# EAGLE board MEDUSA_AMEGA_Shield (EAGLE 9.5.1)
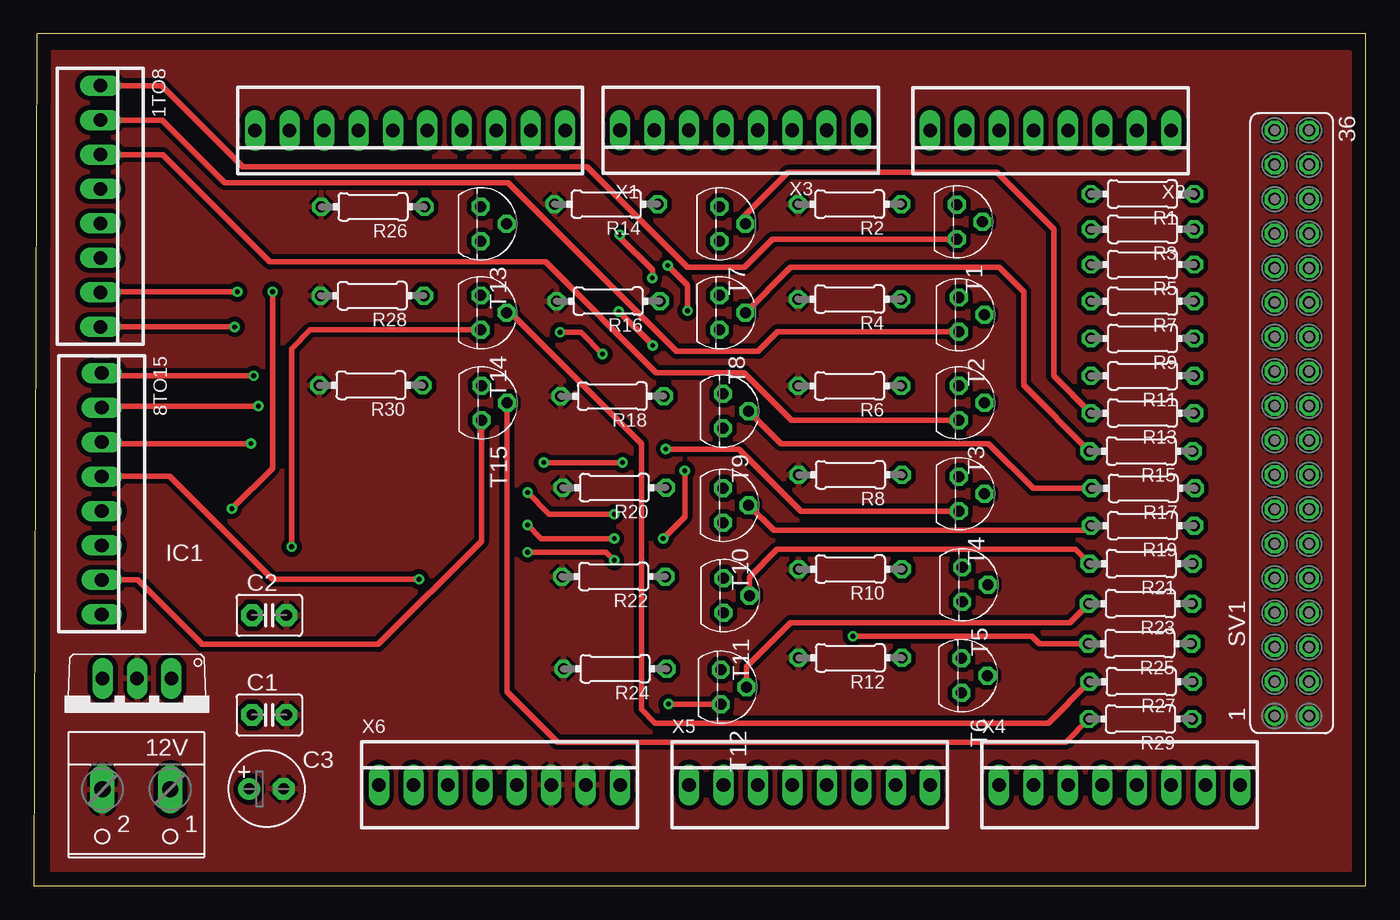
[diagram p0: board, top side]
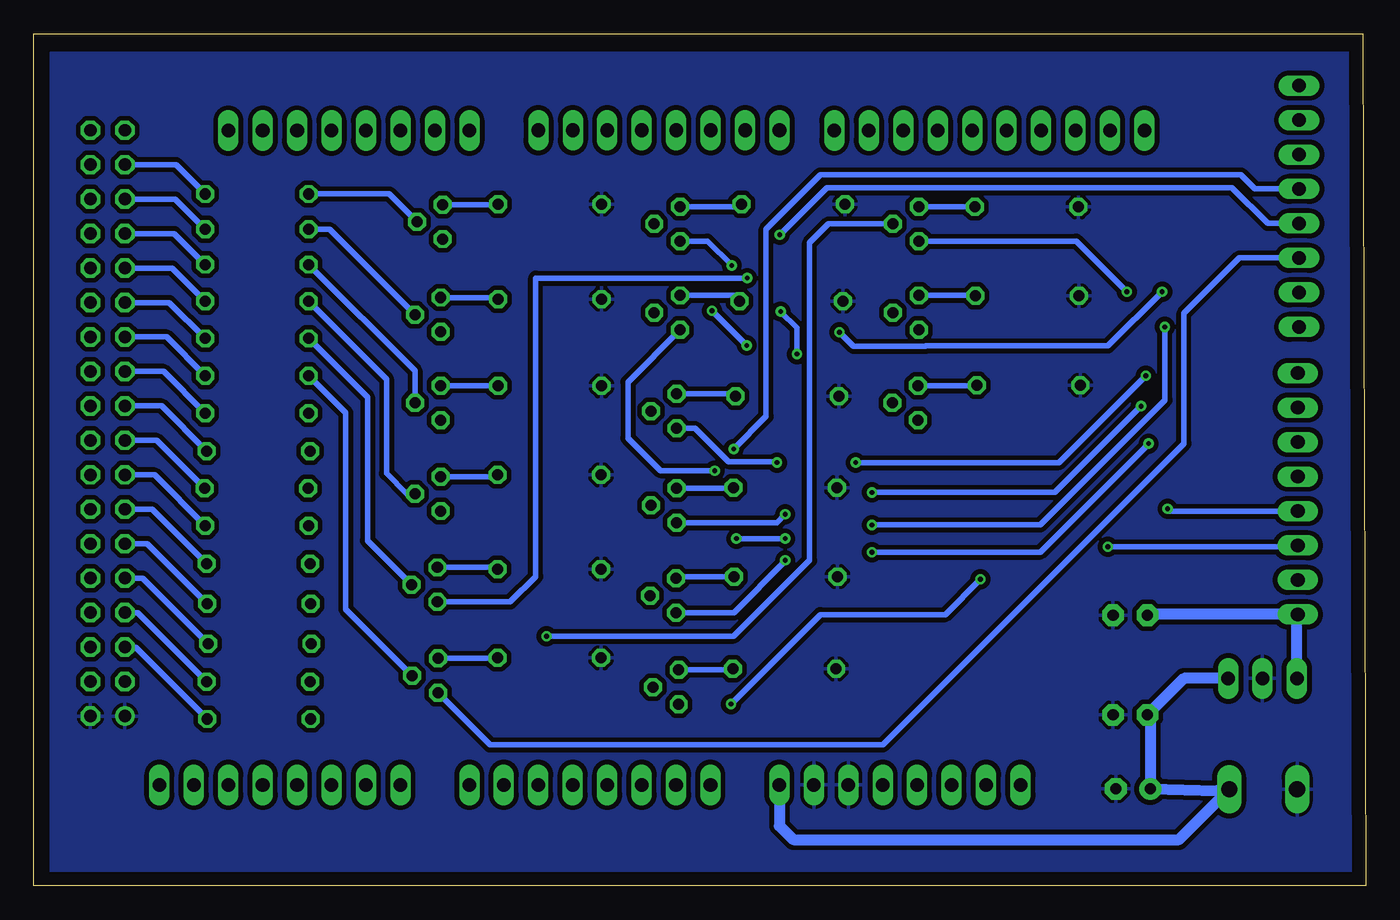
[diagram p1: board, bottom side, seen from below]

Size 98.2 x 62.8 mm. Coordinates in mm from the lower left corner, seen from the top.
Outline: 0,0 98.2,0 98.2,62.8 0.2,62.8 0,0
Copper layers (1*16): Top 0.035mm / dielectric 1.5mm / Bottom 0.035mm
Design rules "default *": minimum track width 6mil, minimum drill 0.35mm, track to track 14mil, track to pad 14mil, pad to pad 14mil, via to via 14mil, smd to smd 6mil, copper to edge 40mil, drill to drill 6mil, minimum pad ring 10mil, minimum via ring 8mil, stop-mask expansion 4mil, vias tented up to drill 0mil, thermal gap 10mil

## Footprints (pad centres in the part's own frame; a part is rotated, then mirrored left to right if it is on the bottom)
22-23-2081 = drill 1 long: 1 -8.89,0; 2 -6.35,0; 3 -3.81,0; 4 -1.27,0; 5 1.27,0; 6 3.81,0; 7 6.35,0; 8 8.89,0
W237-102 = drill 1.194 long: 1 -2.5,-1.27; 2 2.5,-1.27
C2.5-3 = drill 0.813 pad 1.6 octagon: 1 -1.27,0; 2 1.27,0
E2,5-6 = drill 0.813 pad 1.6: + -1.27,0 | drill 0.813 pad 1.6 octagon: - 1.27,0
TO220V = drill 1.016 long: 1 -2.54,-2.54; 2 0,-2.54; 3 2.54,-2.54
0204/7 = drill 0.813 octagon: 1 -3.81,0; 2 3.81,0
FE18-2 = drill 0.914: 1 -21.59,1.27 | drill 0.914 octagon: 2 -21.59,-1.27; 3 -19.05,1.27; 4 -19.05,-1.27; 5 -16.51,1.27; 6 -16.51,-1.27; 7 -13.97,1.27; 8 -13.97,-1.27; 9 -11.43,1.27; 10 -11.43,-1.27; 11 -8.89,1.27; 12 -8.89,-1.27; 13 -6.35,1.27; 14 -6.35,-1.27; 15 -3.81,1.27; 16 -3.81,-1.27; 17 -1.27,1.27; 18 -1.27,-1.27; 19 1.27,1.27; 20 1.27,-1.27; 21 3.81,1.27; 22 3.81,-1.27; 23 6.35,1.27; 24 6.35,-1.27; 25 8.89,1.27; 26 8.89,-1.27; 27 11.43,1.27; 28 11.43,-1.27; 29 13.97,1.27; 30 13.97,-1.27; 31 16.51,1.27; 32 16.51,-1.27; 33 19.05,1.27; 34 19.05,-1.27; 35 21.59,1.27; 36 21.59,-1.27
TO92 = drill 0.813 octagon: 1 1.27,0; 2 0,1.905; 3 -1.27,0
22-23-2101 = drill 1 long: 1 -11.43,0; 2 -8.89,0; 3 -6.35,0; 4 -3.81,0; 5 -1.27,0; 6 1.27,0; 7 3.81,0; 8 6.35,0; 9 8.89,0; 10 11.43,0

## Placement (x,y rotation side)
1TO8  22-23-2081  [22-23-2081]  4.9,50.1 270 top
8TO15  22-23-2081  [22-23-2081]  5,28.9 270 top
12V  [W237-102]  7.55,5.85 180 top
C1  [C2.5-3]  17.35,12.6 0 top
C2  [C2.5-3]  17.35,19.95 0 top
C3  [E2,5-6]  17.15,7.15 0 top
IC1  7805TV  [TO220V]  7.6,12.75 180 top
R1  [0204/7]  81.75,51 180 top
R2  [0204/7]  60.15,50.25 180 top
R3  [0204/7]  81.75,48.4 180 top
R4  [0204/7]  60.15,43.25 180 top
R5  [0204/7]  81.75,45.8 180 top
R6  [0204/7]  60.15,36.85 180 top
R7  [0204/7]  81.75,43.1 180 top
R8  [0204/7]  60.2,30.3 180 top
R9  [0204/7]  81.75,40.35 180 top
R10  [0204/7]  60.2,23.35 180 top
R11  [0204/7]  81.75,37.6 180 top
R12  [0204/7]  60.2,16.8 180 top
R13  [0204/7]  81.75,34.85 180 top
R14  [0204/7]  42.2,50.25 180 top
R15  [0204/7]  81.65,32.05 180 top
R16  [0204/7]  42.35,43.1 180 top
R17  [0204/7]  81.8,29.3 180 top
R18  [0204/7]  42.65,36.1 180 top
R19  [0204/7]  81.75,26.55 180 top
R20  [0204/7]  42.8,29.35 180 top
R21  [0204/7]  81.65,23.75 180 top
R22  [0204/7]  42.75,22.8 180 top
R23  [0204/7]  81.6,20.8 180 top
R24  [0204/7]  42.85,16 180 top
R25  [0204/7]  81.55,17.85 180 top
R26  [0204/7]  25,50.05 180 top
R27  [0204/7]  81.65,15.05 180 top
R28  [0204/7]  24.95,43.5 180 top
R29  [0204/7]  81.6,12.3 180 top
R30  [0204/7]  24.85,36.9 180 top
SV1  [FE18-2]  92.76,34.11 90 top
T1  2N3904  [TO92]  68.05,48.95 270 top
T2  2N3904  [TO92]  68.2,42.1 270 top
T3  2N3904  [TO92]  68.2,35.6 270 top
T4  2N3904  [TO92]  68.2,28.9 270 top
T5  2N3904  [TO92]  68.45,22.2 270 top
T6  2N3904  [TO92]  68.4,15.5 270 top
T7  2N3904  [TO92]  50.55,48.8 270 top
T8  2N3904  [TO92]  50.55,42.25 270 top
T9  2N3904  [TO92]  50.8,35 270 top
T10  2N3904  [TO92]  50.8,28.05 270 top
T11  2N3904  [TO92]  50.85,21.4 270 top
T12  2N3904  [TO92]  50.65,14.65 270 top
T13  2N3904  [TO92]  32.95,48.8 270 top
T14  2N3904  [TO92]  32.95,42.25 270 top
T15  2N3904  [TO92]  33,35.6 270 top
X1  22-23-2101  [22-23-2101]  27.74,55.68 180 top
X2  22-23-2081  [22-23-2081]  74.98,55.67 180 top
X3  22-23-2081  [22-23-2081]  52.11,55.7 180 top
X4  22-23-2081  [22-23-2081]  80.06,7.44 0 top
X5  22-23-2081  [22-23-2081]  57.2,7.44 0 top
X6  22-23-2081  [22-23-2081]  34.34,7.44 0 top

## Library data of the parts
1TO8 8TO15 X2-X6 = con-molex; MF: MOLEX; MPN: 22-23-2081; OC_FARNELL: 1756826; OC_NEWARK: 01C7592
12V = con-wago-500; MPN: 237-102; OC_FARNELL: unknown; OC_NEWARK: 70K9898
C1 C2 = capacitor-wima
C3 = rcl; SPICEPREFIX: C
IC1 = linear
R1-R30 = rcl; SPICEPREFIX: R
SV1 = con-lsta; OC_FARNELL: unknown; OC_NEWARK: unknown
T1-T15 = transistor
X1 = con-molex; MF: MOLEX; MPN: 22-23-2101; OC_FARNELL: 1756828; OC_NEWARK: 94C0765

## Nets
3.3V: X6.4
5V: X6.5
5VLED: 8TO15.8 C2.1 IC1.3
12V: 12V.1 C1.1 C3.+ IC1.1 X6.8
A0: X5.1
A1: X5.2
A2: X5.3
A3: X5.4
A4: X5.5
A5: X5.6
A6: X5.7
A7: X5.8
A8: X4.1
A9: X4.2
A10: X4.3
A11: X4.4
A12: X4.5
A13: X4.6
A14: X4.7
A15: X4.8
AREF: X1.8
GND: 12V.2 C1.2 C2.2 C3.- IC1.2 R2.2 R4.2 R6.2 R8.2 R10.2 R12.2 R14.2 R16.2 R18.2 R20.2 R22.2 R24.2 R26.2 R28.2 R30.2 SV1.1 SV1.2 X6.6 X6.7
GND3: X1.7
I/OREF: X6.2
L1: 1TO8.1 T1.1
L2: 1TO8.2 T2.1
L3: 1TO8.3 T3.1
L4: 1TO8.4 T4.1
L5: 1TO8.5 T5.1
L6: 1TO8.6 T6.1
L7: 1TO8.7 T7.1
L8: 1TO8.8 T8.1
L9: 8TO15.1 T9.1
L10: 8TO15.2 T10.1
L11: 8TO15.3 T11.1
L12: 8TO15.4 T12.1
L13: 8TO15.5 T13.1
L14: 8TO15.6 T14.1
L15: 8TO15.7 T15.1
N$1: R1.2 T1.2
N$2: R2.1 T1.3
N$19: R3.2 T2.2
N$20: R4.1 T2.3
N$22: R5.2 T3.2
N$23: R6.1 T3.3
N$25: R7.2 T4.2
N$26: R8.1 T4.3
N$28: R9.2 T5.2
N$29: R10.1 T5.3
N$31: R11.2 T6.2
N$32: R12.1 T6.3
N$34: R13.2 T7.2
N$35: R14.1 T7.3
N$37: R15.2 T8.2
N$38: R16.1 T8.3
N$40: R17.2 T9.2
N$41: R18.1 T9.3
N$43: R19.2 T10.2
N$44: R20.1 T10.3
N$46: R21.2 T11.2
N$47: R22.1 T11.3
N$49: R23.2 T12.2
N$50: R24.1 T12.3
N$52: R25.2 T13.2
N$53: R26.1 T13.3
N$55: R27.2 T14.2
N$56: R28.1 T14.3
N$58: R29.2 T15.2
N$59: R30.1 T15.3
N/C: X6.1
P0: X3.1
P1: X3.2
P2: X3.3
P3: X3.4
P4: X3.5
P5: X3.6
P5V1: SV1.35
P5V2: SV1.36
P6: X3.7
P7: X3.8
P8: X1.1
P9: X1.2
P10: X1.3
P11: X1.4
P12: X1.5
P13: X1.6
P14: X2.8
P15: X2.7
P16: X2.6
P17: X2.5
P18: X2.4
P19: X2.3
P20: X2.2
P21: X2.1
P22: R1.1 SV1.33
P23: SV1.34
P24: R3.1 SV1.31
P25: SV1.32
P26: R5.1 SV1.29
P27: SV1.30
P28: R7.1 SV1.27
P29: SV1.28
P30: R9.1 SV1.25
P31: SV1.26
P32: R11.1 SV1.23
P33: SV1.24
P34: R13.1 SV1.21
P35: SV1.22
P36: R15.1 SV1.19
P37: SV1.20
P38: R17.1 SV1.17
P39: SV1.18
P40: R19.1 SV1.15
P41: SV1.16
P42: R21.1 SV1.13
P43: SV1.14
P44: R23.1 SV1.11
P45: SV1.12
P46: R25.1 SV1.9
P47: SV1.10
P48: R27.1 SV1.7
P49: SV1.8
P50: R29.1 SV1.5
P51: SV1.6
P52: SV1.3
P53: SV1.4
RESET: X6.3
SCL: X1.10
SDA: X1.9

## Tracks (layer width: path | path; a pad name or v marks a point on that pad's centre or on a via)
5VLED
  Bottom 0.813: IC1.3 5.06,19.95 8TO15.8 16.02,20.01 C2.1
12V
  Bottom 0.813: IC1.1 13.39,15.29 C1.1 15.88,12.4 C3.+ 10.95,7.02 12V.1 13.77,3.4 42.2,3.4 43.23,4.43 X6.8
GND
  pour Bottom: 1,61.4 97,61.4 97,1 1,1
  pour Top: 1.4,61.4 97,61.4 97,1.2 1.4,1.2
L1
  Top 0.406: T1.1 54.48,47.68 52.4,45.6 48.2,45.6 40.8,53 15.4,53 9.41,58.99 1TO8.1
L2
  Top 0.406: T2.1 54.83,40.83 53.4,39.4 47.4,39.4 34.96,51.84 14.08,51.84 9.47,56.45 1TO8.2
L3
  Top 0.406: T3.1 55.87,34.33 52.36,37.84 45.88,37.84 37.72,46 17.4,46 9.49,53.91 1TO8.3
L4  (via drill 0.35)
  Top 0.406: T4.1 56.57,27.63 52,32.2 v46.6,32.2
  Bottom 0.406: v46.6,32.2 44.2,34.6 44.2,48.4 40.2,52.4 9.2,52.4 8.17,51.37 1TO8.4
L5  (via drill 0.35)
  Top 0.406: v45.6,44.8 45.6,45.4 43.2,47.8 v43.2,48
  Bottom 0.406: T5.1 63.07,20.93 61.2,22.8 61.2,44.8 v45.6,44.8 | 1TO8.5 7.23,48.83 9.87,51.47 39.73,51.47 v43.2,48 43.27,47.93
L6
  Bottom 0.406: T6.1 64.57,10.4 35.6,10.4 13.4,32.6 13.4,42.2 9.31,46.29 1TO8.6
L7  (via drill 0.35)
  Top 0.406: v46.74,45.74 48.2,44.27 v48.2,42.4 | v45.64,39.84 v43.14,42.34 | v41.94,39.2 40.34,40.8 v38.8,40.8 | v15,43.8 4.95,43.8 1TO8.7
  Bottom 0.406: T7.1 48.53,47.53 v46.74,45.74 | v48.2,42.4 v45.64,39.84 | v43.14,42.34 41.94,41.14 v41.94,39.2 | v38.8,40.8 37.76,39.76 32.45,39.76 32.41,39.8 19,39.8 v15,43.8
L8  (via drill 0.35)
  Top 0.406: v48,30.6 48,27.2 v46.4,25.6 | v42.8,25.6 37.4,25.6 v36.4,26.6 | v14.8,41.2 1TO8.8
  Bottom 0.406: T8.1 54.4,37.13 54.4,33 52,30.6 v48,30.6 | v46.4,25.6 v42.8,25.6 | v36.4,26.6 24,26.6 14.8,35.8 v14.8,41.2
L9  (via drill 0.35)
  Top 0.406: v43.4,31.2 v37.6,31.2 | v16.2,37.6 5.19,37.6 8TO15.1
  Bottom 0.406: T9.1 49.45,33.73 46.99,31.26 43.46,31.26 v43.4,31.2 | v37.6,31.2 22.6,31.2 v16.2,37.6
L10  (via drill 0.35)
  Top 0.406: v42.8,27.4 38,27.4 v36.4,29 | v16.56,35.36 5.11,35.36 8TO15.2
  Bottom 0.406: T10.1 43.42,26.78 v42.8,27.4 | v36.4,29 22.93,29 v16.56,35.36
L11  (via drill 0.35)
  Top 0.406: v42.8,24 42.2,24.6 v36.4,24.6 | v16,32.6 5.11,32.6 8TO15.3
  Bottom 0.406: T11.1 46.59,20.13 42.8,23.92 v42.8,24 | v36.4,24.6 24,24.6 v16,32.6
L12  (via drill 0.35)
  Top 0.406: T12.1 46.82,13.38 v46.8,13.4 | v28.4,22.6 17.6,22.6 10,30.2 5.03,30.2 8TO15.4
  Bottom 0.406: v46.8,13.4 40.2,20 31,20 v28.4,22.6
L13  (via drill 0.35)
  Top 0.406: v17.6,43.8 17.6,30.8 v14.6,27.8
  Bottom 0.406: T13.1 21.33,47.53 v17.6,43.8 | v14.6,27.8 14.43,27.63 8TO15.5
L14  (via drill 0.35)
  Top 0.406: T14.1 20.38,40.98 19,39.6 v19,25
  Bottom 0.406: v19,25 5.09,25 8TO15.6
L15
  Top 0.406: T15.1 33,25.4 25.4,17.8 12.4,17.8 7.65,22.55 8TO15.7
N$1
  Bottom 0.406: R1.2 72,51 T1.2
N$2
  Bottom 0.406: T1.3 63.99,50.22 R2.1
N$19
  Bottom 0.406: R3.2 76.41,48.4 T2.2
N$20
  Bottom 0.406: T2.3 64.08,43.37 R4.1
N$22
  Bottom 0.406: R5.2 70.11,37.97 T3.2
N$23
  Bottom 0.406: R6.1 68.18,36.85 T3.3
N$25
  Bottom 0.406: R7.2 72.2,37.36 72.2,30.4 70.7,28.9 T4.2
N$26
  Bottom 0.406: T4.3 64.14,30.17 R8.1
N$28
  Bottom 0.406: R9.2 73.6,36.01 73.6,25.45 T5.2
N$29
  Bottom 0.406: T5.3 64.13,23.47 R10.1
N$31
  Bottom 0.406: R11.2 75.2,34.86 75.2,20.39 T6.2
N$32
  Bottom 0.406: T6.3 64.04,16.77 R12.1
N$34
  Top 0.406: R13.2 75.2,37.59 75.2,48.4 71,52.6 55.6,52.6 52.45,49.45 T7.2
N$35
  Bottom 0.406: T7.3 46.19,50.07 R14.1
N$37
  Top 0.406: R15.2 73,36.89 73,43.8 71.2,45.6 55.8,45.6 T8.2
N$38
  Bottom 0.406: T8.3 46.58,43.52 R16.1
N$40
  Top 0.406: R17.2 73.7,29.3 70.4,32.6 55.1,32.6 T9.2
N$41
  Bottom 0.406: T9.3 46.63,36.27 R18.1
N$43
  Top 0.406: R19.2 77.59,26.2 54.55,26.2 T10.2
N$44
  Bottom 0.406: T10.3 46.64,29.32 R20.1
N$46
  Top 0.406: R21.2 76.79,24.8 54.8,24.8 52.76,22.75 T11.2
N$47
  Bottom 0.406: R22.1 50.72,22.8 T11.3
N$49
  Top 0.406: R23.2 76.39,19.4 55.8,19.4 52.55,16.16 T12.2
N$50
  Bottom 0.406: T12.3 46.74,15.92 R24.1
N$52  (via drill 0.35)
  Top 0.406: R25.2 74.15,17.85 73.6,18.4 v60.4,18.4
  Bottom 0.406: v60.4,18.4 46.6,18.4 41,24 41,47.4 39.6,48.8 T13.2
N$53
  Bottom 0.406: T13.3 28.83,50.07 R26.1
N$55
  Top 0.406: R27.2 74.79,12 45.8,12 44.8,13 44.8,32.6 35.4,42 35.1,42 T14.2
N$56
  Bottom 0.406: T14.3 28.78,43.52 R28.1
N$58
  Top 0.406: R29.2 76.09,10.6 38.6,10.6 34.91,14.3 T15.2
N$59
  Bottom 0.406: T15.3 28.69,36.87 R30.1
P22
  Bottom 0.406: R1.1 87.72,53.16 SV1.33
P24
  Bottom 0.406: R3.1 87.78,50.62 SV1.31
P26
  Bottom 0.406: R5.1 87.84,48.08 SV1.29
P28
  Bottom 0.406: R7.1 88,45.54 SV1.27
P30
  Bottom 0.406: R9.1 88.21,43 SV1.25
P32
  Bottom 0.406: R11.1 88.42,40.46 SV1.23
P34
  Bottom 0.406: R13.1 88.63,37.92 SV1.21
P36
  Bottom 0.406: R15.1 88.79,35.38 SV1.19
P38
  Bottom 0.406: R17.1 89.15,32.84 SV1.17
P40
  Bottom 0.406: R19.1 89.31,30.3 SV1.15
P42
  Bottom 0.406: R21.1 89.47,27.76 SV1.13
P44
  Bottom 0.406: R23.1 89.83,25.22 SV1.11
P46
  Bottom 0.406: R25.1 90.19,22.68 SV1.9
P48
  Bottom 0.406: R27.1 90.55,20.14 SV1.7
P50
  Bottom 0.406: R29.1 90.71,17.6 SV1.5